# Altium PCB Rev3_3_PCB.PcbDoc (part 2 of 2)
Units mm, origin at the board's own origin, x right, y up, seen from the top; angles counter-clockwise.
Board outline 83.3 x 97.3 mm, 4 copper layers (Top Layer, Ground, Power, Bottom Layer), stack 1.527 mm thick; 95 components, 66 nets, 384 pads, 113 vias.
Unrouted connection lines stored in the file: 27.
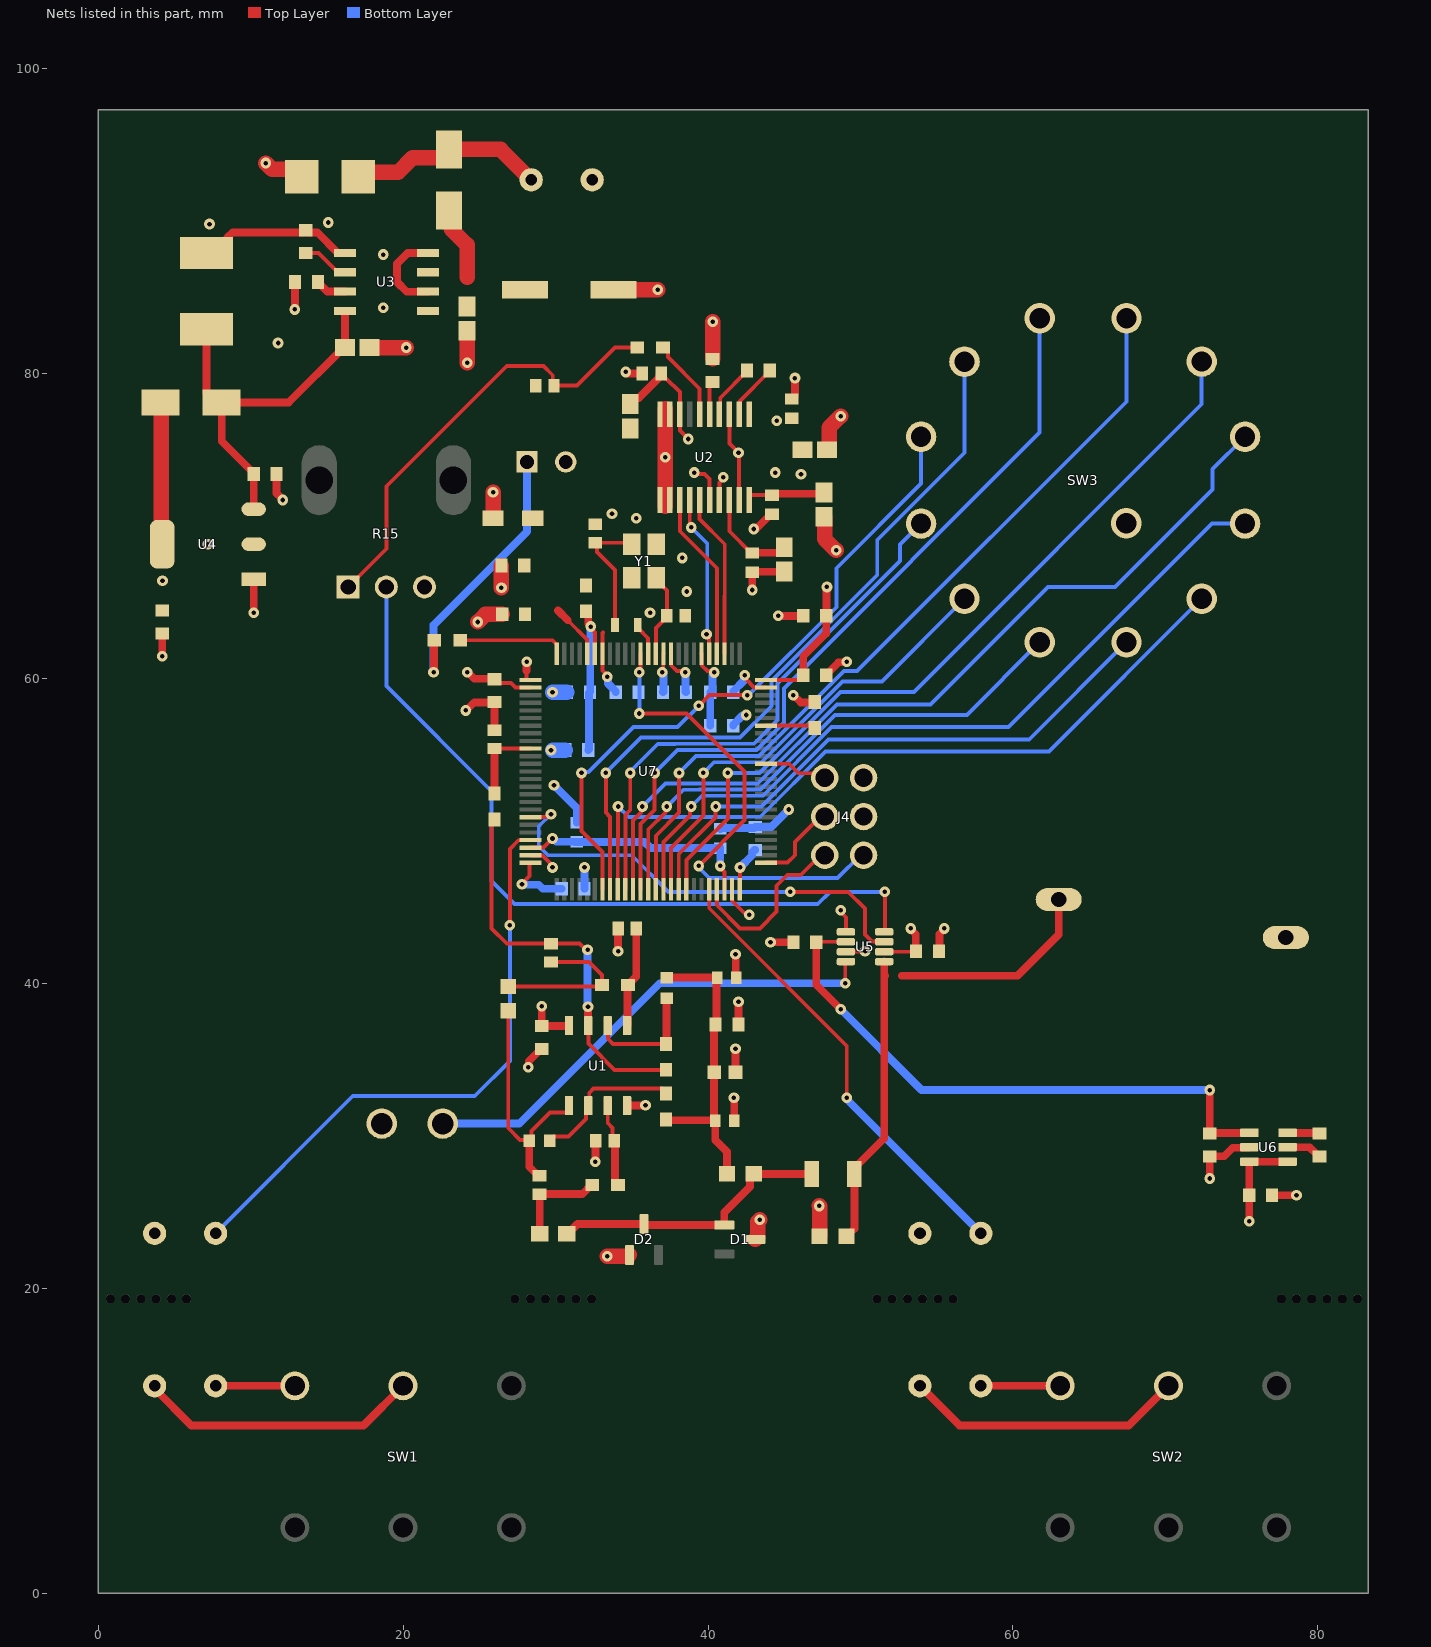
[diagram p4: the nets of this part, all layers, seen from the top]

## Via types
v1: diameter 0.7, hole 0.3, Top Layer to Bottom Layer, 113 vias

## Nets (pads, with @x,y where several pads share a name; then routed paths per layer and width w, separated by ;. In a path a pad name is that pad's centre, name@x,y a point inside that pad or via, vN(x,y) a via of type N, cw(c..) or ccw(c..) an arc to the next point about the centre after c; other vN are vias at no path point)
+1V65: C8.1 C9.2 R1.1 R2.1 R10.1 R11.1 R12.2 | length 19.8
  Top Layer w0.508: R2.1@37.25,31.075 37.3,31.025 40.424,31.025 R11.1@40.474,30.975 40.474,29.724 41.247,28.952 R10.1@41.247,27.5 ; R1.1@37.3,40.375 R12.2@40.6,40.375 40.55,40.325 40.55,37.35 40.4,37.2 C8.1@40.4,34.175 R11.1@40.4,31.049
+3V3: C1.1 C11.1 C13.2 C15.1 C16.1 C17.2 C18.2 C27.1 C28.2 C32.1 C42.1 C43.1 C44.1 C45.1 C46.1 C47.1 C48.1 C49.1 D1.3 D3.2 FB1.1 J4.2 JW1.2 JW2.2 R11.2 SW3.A U1.8 U2.1 U2.8 U2.17 U2.20 U4.2 U4.4 U5.2 U6.3 U6.4 U7.6 U7.11 U7.27 U7.50 U7.75 U7.100 | length 71.2
  Top Layer w0.254: C47.1@26,59.95 26.25,59.7 27.081,59.7 27.368,59.413 28.344,59.413 U7.27@28.357,59.4 ; v1(27.8,46.5) 27.8,46.534 28.3,47.034 28.3,47.887 28.344,47.887 U7.50@28.357,47.9 ; C18.2@36.925,80 36.925,79.925 37.173,79.677 37.248,79.677 38.15,78.775 U2.8@38.15,77.339 38.15,76.25 v1(38.7,75.7) ; v1(37,60.4) 37.066,60.466 37.066,61.609 U7.11@37.078,61.622 ; U7.6@39.578,61.622 39.591,61.609 39.591,60.846 39.96,60.477 40.314,60.477 v1(40.399,60.392) ; U2.17@40.75,71.7 40.75,72.845 41,73.095 v1(41,73.2) ; U7.75@42.078,46.178 42.091,46.191 42.091,46.86 42.1,46.869 v1(42.1,47.6) ; U2.20@42.7,71.7 42.7,71.974 42.751,72.025 C13.2@44.2,72.025 ; U7.100@43.8,59.9 45.977,59.9 46.25,60.173 C45.1@46.25,60.2 ; U5.2@51.555,42.075 53.625,42.075 C28.2@53.65,42.1
  Top Layer w0.508: v1(24.2,60.4) 24.252,60.4 24.677,59.975 25.804,59.975 25.829,59.95 C47.1@26,59.95 ; v1(29.1,38.5) C1.1@29.1,37.2 30.859,37.2 30.88,37.221 U1.8@30.88,37.225 ; C16.1@34.9,78.001 34.9,78.1 35.199,78.399 35.47,78.399 36.804,79.733 36.804,79.879 C18.2@36.925,80 ; v1(41.7,32.5) 41.713,32.487 41.713,30.988 R11.2@41.726,30.975 ; C13.2@44.2,72.025 44.288,72.113 47.512,72.113 C11.1@47.6,72.201 ; C45.1@46.25,60.2 46.25,61.45 47.75,62.95 C44.1@47.75,64.1 47.775,64.125 47.775,65.975 v1(47.8,66) ; v1(53.3,43.6) 53.3,43.548 53.625,43.223 53.625,42.296 53.65,42.271 C28.2@53.65,42.1 ; v1(75.5,24.4) C32.1@75.5,26.1 U6.3@75.5,28.3 U6.4@78.01,28.3
  Top Layer w1.016: D3.2@4.1,78.1 4.15,78.05 4.15,68.85 U4.4@4.2,68.8 ; FB1.1@25.9,70.5 v1(25.9,72.2) ; D1.3@43.1,23.2 43.252,23.352 43.252,24.352 v1(43.4,24.5)
  Bottom Layer w0.508: v1(27.8,46.5) 27.837,46.463 28.903,46.463 29.166,46.2 C48.1@30.4,46.2 ; C46.1@37.05,59.1 37.075,59.125 37.075,60.375 v1@37.1,60.4 ; C42.1@40.15,56.9 40.15,57.884 40.154,57.888 40.154,59.096 40.296,59.238 40.296,60.237 40.399,60.34 v1(40.399,60.392) ; v1(42.1,47.6) 42.904,48.404 42.904,48.604 43.05,48.75 C49.1@43.1,48.75
  other v1: 4.22,66.414 7.2,68.8 46.1,73.4 44.4,73.5 44.5,76.9
+9V: CR1.1 D4.2 J1.1 | length 13
  Top Layer w1.016: CR1.1@17.054,92.9 17.348,93.194 19.67,93.194 20.626,94.149 22.658,94.149 23,94.491 D4.2@23,94.7 26.4,94.7 J1.1@28.4,92.7
+9V_PROT: C22.1 C23.1 D4.1 U3.5 U3.7 | length 4.9
  Top Layer w1.016: D4.1@23,90.7 23.142,90.558 23.142,89.487 24.2,88.429 24.2,86.3
-3V3: C29.1 C30.2 U5.6 U6.1 | length 38.9
  Top Layer w0.254: C30.2@47.1,42.7 47.125,42.725 U5.6@49.045,42.725
  Top Layer w0.508: C30.2@47.1,42.7 47.1,39.9 v1(48.7,38.3) ; v1(72.9,33) C29.1@72.9,30.15 72.925,30.175 75.475,30.175 U6.1@75.5,30.2
  Bottom Layer w0.508: v1(48.7,38.3) 54,33 v1(72.9,33)
BIASED_INPUT: C7.2 D1.1 D2.3 R8.1 R10.2 | length 18.6
  Top Layer w0.508: R8.1@30.725,23.575 30.797,23.575 31.437,24.215 D2.3@35.8,24.215 35.865,24.15 D1.1@41.07,24.15 41.07,24.97 42.751,26.651 42.751,27.251 R10.2@43,27.5 C7.2@46.8,27.5
GND: C1.2 C3.2 C5.2 C6.2 C8.2 C9.1 C10.2 C11.2 C12.1 C13.1 C15.2 C16.2 C17.1 C18.1 C19.2 C20.2 C22.2 C23.2 C24.2 C25.2 C26.2 C27.2 C28.1 C29.2 C30.1 C32.2 C33.2 C34.2 C35.1 C36.2 C37.2 C38.2 C39.2 C40.2 C41.2 C42.2 C43.2 C44.2 C45.2 C46.2 C47.2 C48.2 C49.2 CR1.2 D2.1 DS1.2 J1.2 J2.1 J3.S J4.3 R12.1 R13.2 R15.3 R18.1 U1.4 U2.3 U2.9 U2.10 U2.11 U2.12 U2.16 U2.19 U3.6 U3.8 U4.1 U5.5 U5.7 U6.2 U7.10 U7.19 U7.26 U7.49 U7.74 U7.99 Y1.2 Y1.4 | length 119.9
  Top Layer w0.254: 28.1,60.5 28.1,59.913 28.113,59.9 U7.26@28.357,59.9 ; U7.49@28.357,48.4 28.37,48.387 29.132,48.387 29.8,47.719 v1(29.8,47.6) ; 33.1,63 33.078,62.978 U7.19@33.078,61.622 33.078,60.51 33.4,60.188 v1(33.4,60.1) ; U7.10@37.578,61.622 37.591,61.609 37.591,60.846 37.962,60.476 38.415,60.476 v1(38.5,60.391) ; v1(39.1,73.5) 39.185,73.415 39.765,73.415 40.1,73.079 U2.16@40.1,71.7 ; U2.3@41.4,77.339 41.4,75.4 42.025,74.775 42.025,71.725 U2.19@42.05,71.7 ; U7.74@41.578,46.178 41.591,46.166 41.591,45.403 42.409,44.585 42.615,44.585 v1(42.7,44.5) ; v1(42.4,60.2) 42.485,60.115 42.485,59.952 43.025,59.413 U7.99@43.787,59.413 ; v1(48.7,44.8) 48.7,44.679 49.045,44.334 U5.5@49.045,43.375 ; U5.7@49.045,42.075 49.058,42.088 50.288,42.088 v1(50.3,42.1)
  Top Layer w0.508: v1(4.2,61.45) C27.2@4.2,62.95 ; v1(10.2,64.3) U4.1@10.2,66.5 ; C26.2@11.7,73.4 11.7,72.152 12.1,71.752 v1(12.1,71.7) ; v1(12.9,84.2) 12.906,84.206 12.906,85.994 C24.2@12.911,86 ; U3.6@21.635,85.365 20.235,85.365 19.6,86 19.6,87.2 20.305,87.905 U3.8@21.635,87.905 ; v1(24.1,57.9) 24.152,57.9 24.677,58.425 25.804,58.425 25.829,58.45 C47.2@26,58.45 C6.2@26,56.6 ; 28.1,60.5 v1(28.1,61.1) ; v1(28.2,34.5) 28.237,34.537 28.237,34.887 29.05,35.7 C1.2@29.1,35.7 ; v1(32.6,28.3) 32.625,28.325 32.625,29.65 C5.2@32.65,29.675 ; v1(34.1,42.1) C3.2@34.1,43.6 ; v1(34.6,80.1) 34.652,80.1 34.752,80 C18.1@35.675,80 ; U1.4@34.69,31.975 34.703,31.988 35.887,31.988 v1(35.9,32) ; C8.2@41.8,34.175 v1(41.8,35.7) ; v1(41.8,41.9) 41.826,41.874 41.826,40.401 R12.1@41.852,40.375 ; C9.1@42,37.3 v1(42,38.8) ; v1(42.9,65.8) C12.1@42.9,66.975 42.912,66.987 44.988,66.987 C10.2@45,66.999 ; v1(43,69.8) 43.037,69.837 43.187,69.837 44.125,70.775 C13.1@44.2,70.775 ; v1(44.1,42.7) C30.1@45.6,42.7 ; v1(44.6,64.1) C44.2@46.25,64.1 ; C17.1@45.5,78.325 45.575,78.325 45.696,78.446 45.696,78.74 45.7,78.744 v1(45.7,79.7) ; v1(45.6,58.9) 46.075,58.425 46.854,58.425 46.879,58.45 R18.1@47,58.45 ; C45.2@47.75,60.2 47.75,60.25 48.563,61.063 49.063,61.063 v1(49.1,61.1) ; C28.1@55.15,42.1 55.15,42.271 55.175,42.296 55.175,43.223 55.5,43.548 v1(55.5,43.6) ; v1(72.9,27.2) C29.2@72.9,28.65 73.85,28.65 74.414,29.214 75.464,29.214 U6.2@75.5,29.25 ; C32.2@77,26.1 v1(78.6,26.1)
  Top Layer w1.016: v1(10.989,93.8) 11.404,93.385 12.861,93.385 CR1.2@13.346,92.9 ; C25.2@17.8,81.7 v1(20.2,81.7) ; v1(24.2,80.7) C22.2@24.2,82.799 ; v1(24.9,63.7) 25.4,64.2 C37.2@26.5,64.2 ; v1(26.45,65.95) C36.2@26.45,67.4 ; v1(33.4,22.1) 34.765,22.1 D2.1@34.85,22.185 ; C23.2@33.803,85.5 v1(36.7,85.5) ; 37.2,71.3 37.2,77.7 ; C19.2@40.3,80.95 v1(40.3,83.4) ; v1(47.3,25.4) 47.323,25.377 R13.2@47.323,23.4 ; C11.2@47.6,70.599 47.645,70.554 47.645,69.155 v1(48.4,68.4) ; C15.2@47.801,75 47.9,75 47.945,75.045 47.945,76.445 v1(48.7,77.2)
  Bottom Layer w0.508: v1(29.9,53) 31.4,51.5 C38.2@31.4,50.527 ; C48.2@31.9,46.2 v1(31.9,47.6) ; v1(33.4,60.1) 33.437,60.063 33.437,59.663 33.95,59.15 C35.1@33.95,59.1 ; v1(38.5,60.391) 38.525,60.366 38.525,59.125 C46.2@38.55,59.1 ; C39.2@40.8,50.127 40.861,50.189 43.038,50.189 C49.2@43.1,50.25 44.15,50.25 v1(45.3,51.4) ; C42.2@41.65,56.9 41.65,56.95 42.263,57.563 42.463,57.563 v1(42.5,57.6) ; C43.2@41.65,59.1 41.65,59.15 42.363,59.863 42.363,60.163 v1(42.4,60.2)
  Bottom Layer w1.016: v1@29.8,55.3 C40.2@30.65,55.3 ; v1(29.8,59.1) C41.2@30.75,59.1
  other v1: 29.7,55.3 36.2,64.3 38.6,65.7 38.3,67.9 35.3,70.5 33.7,70.8 37.2,74.5 42,74.8 11.8,82 18.7,84.3 18.7,87.8 7.3,89.8 15.1,89.9
LDOO: C10.1 C12.2 U2.18 | length 6.4
  Top Layer w0.254: U2.18@41.4,71.7 41.4,69.65 42.825,68.225 C12.2@42.9,68.225
  Top Layer w0.508: C12.2@42.9,68.225 43.075,68.225 43.096,68.246 44.701,68.246 45,68.545 C10.1@45,68.601
NetC2_1: C2.1 R6.2 R7.1 | length 10.5
  Top Layer w0.254: R6.2@26.9,39.8 32.95,39.8 R7.1@33.05,39.9 33.05,40.55 32.2,41.4 C2.1@29.7,41.4
NetC2_2: C2.2 R3.1 R5.1 U1.7 | length 26.1
  Top Layer w0.254: R5.1@26,50.75 25.8,50.55 25.8,43.6 26.8,42.6 C2.2@29.7,42.6 31.579,42.6 31.979,42.2 v1(32.1,42.2) ; U1.7@32.15,37.225 32.15,36.05 33.875,34.325 R3.1@37.25,34.325
  Top Layer w0.508: v1(32.129,38.471) 32.129,37.246 U1.7@32.15,37.225
  Bottom Layer w0.508: v1(32.1,42.2) 32.1,38.5 v1(32.129,38.471)
NetC3_1: C3.1 R7.2 U1.5 | length 6.7
  Top Layer w0.508: U1.5@34.69,37.225 34.711,37.246 34.711,39.861 R7.2@34.75,39.9 34.8,39.9 34.946,40.046 34.946,40.096 35.3,40.45 C3.1@35.3,43.6
NetC4_1: C4.1 R8.2 R9.1 | length 6.3
  Top Layer w0.508: R8.2@28.975,23.575 28.962,23.587 28.962,26.163 C4.1@28.95,26.175 31.75,26.175 32.35,26.775 R9.1@32.4,26.775
NetC4_2: C4.2 R4.1 R6.1 U1.1 | length 16.1
  Top Layer w0.254: R6.1@26.9,38.2 26.9,30.5 27.665,29.735 28.214,29.735 R4.1@28.275,29.675 28.413,29.814 28.413,30.313 29.626,31.526 30.732,31.526 30.88,31.674 U1.1@30.88,31.975
  Top Layer w0.508: R4.1@28.275,29.675 28.275,27.975 28.875,27.375 C4.2@28.95,27.375
NetC5_1: C5.1 R9.2 U1.3 | length 5.1
  Top Layer w0.254: U1.3@33.42,31.975 33.42,30.829 33.742,30.506 33.742,29.783 C5.1@33.85,29.675
  Top Layer w0.508: R9.2@33.9,26.8 C5.1@33.9,29.375
NetC6_1: C6.1 R5.2 U7.35 | length 5.3
  Top Layer w0.254: C6.1@26,55.4 U7.35@28.357,55.4
  Top Layer w0.508: R5.2@26,52.45 C6.1@26,55.4
NetC14_1: C14.1 U2.4 | length 3.6
  Top Layer w0.254: U2.4@40.75,77.339 40.801,77.39 40.801,78.401 42.55,80.15 C14.1@42.55,80.2
NetC14_2: C14.2 U2.2 | length 3.7
  Top Layer w0.254: U2.2@42.05,77.339 42.101,77.39 42.101,78.201 44.05,80.15 C14.2@44.05,80.2
NetC20_1: C20.1 R14.2 R15.1 | length 29.3
  Top Layer w0.254: R15.1@16.4,66 18.9,68.5 18.9,72.6 26.8,80.5 29.2,80.5 29.818,79.882 29.818,79.282 C20.1@29.9,79.2 31.4,79.2 33.9,81.7 R14.2@35.35,81.7
NetC21_1: C21.1 U3.2 | length 3.1
  Top Layer w0.254: C21.1@13.611,87.9 14.458,87.9 15.723,86.635 U3.2@16.187,86.635
NetC21_2: C21.2 L1.2 U3.1 | length 10.5
  Top Layer w0.508: L1.2@7.1,87.902 7.687,87.902 8.487,88.702 8.487,88.92 8.821,89.254 13.465,89.254 C21.2@13.611,89.4 13.757,89.254 14.374,89.254 15.723,87.905 U3.1@16.187,87.905
NetC24_1: C24.1 U3.3 | length 2.1
  Top Layer w0.508: C24.1@14.411,86 14.411,85.95 14.557,85.804 14.607,85.804 15.033,85.378 16.174,85.378 U3.3@16.187,85.365
NetC25_1: C25.1 C26.1 D3.1 L1.1 U3.4 U4.3 | length 25.3
  Top Layer w0.508: L1.1@7.1,82.898 7.1,79.1 7.104,79.096 7.104,78.696 7.7,78.1 D3.1@8.1,78.1 ; U4.3@10.2,71.1 C26.1@10.2,73.4 10.2,73.45 8.1,75.55 D3.1@8.1,78.1 ; U3.4@16.187,84.095 16.193,84.089 16.193,81.706 C25.1@16.199,81.7 16.099,81.7 12.499,78.1 D3.1@8.1,78.1
NetC31_1: C31.1 U6.5 | length 2.3
  Top Layer w0.508: U6.5@78.01,29.25 79.45,29.25 80.05,28.65 C31.1@80.1,28.65
NetC31_2: C31.2 U6.6 | length 2.1
  Top Layer w0.508: U6.6@78.01,30.2 78.035,30.175 80.075,30.175 C31.2@80.1,30.15
NetC34_1: C34.1 R16.1 Y1.3 | length 8.4
  Top Layer w0.254: R16.1@33.9,63.5 33.9,67.1 32.707,68.293 32.707,68.793 C34.1@32.6,68.9 34.9,68.9 Y1.3@35,68.8
NetDS1_1: DS1.1 R17.1 | length 18.5
  Top Layer w0.508: v1(22,60.4) 22.025,60.425 22.025,62.475 R17.1@22.05,62.5
  Bottom Layer w0.508: v1(22,60.4) 22,63.5 28.13,69.63 DS1.1@28.13,74.2
NetJW1_1: JW1.1 SW1.1 | length 18.6
  Top Layer w0.508: JW1.1@3.7,13.6 3.7,13.4 6.1,11 17.4,11 SW1.1@20,13.6
NetJW2_1: JW2.1 SW2.1 | length 18.5
  Top Layer w0.508: JW2.1@53.9,13.6 56.5,11 67.6,11 SW2.1@70.2,13.6
NetJW3_1: JW3.1 SW1.4 | length 5.2
  Top Layer w0.508: JW3.1@7.7,13.6 SW1.4@12.9,13.6
NetJW3_2: JW3.2 U7.47 | length 39.5
  Top Layer w0.254: v1(27,43.8) 27,48.806 27.582,49.387 28.344,49.387 U7.47@28.357,49.4
  Bottom Layer w0.254: JW3.2@7.7,23.6 16.7,32.6 24.7,32.6 27,34.9 v1(27,43.8)
NetJW4_1: JW4.1 SW2.4 | length 5.2
  Top Layer w0.508: JW4.1@57.9,13.6 SW2.4@63.1,13.6
NetJW4_2: JW4.2 U7.71 | length 30
  Top Layer w0.254: U7.71@40.078,46.178 40.078,44.922 49.1,35.9 v1(49.1,32.5)
  Bottom Layer w0.508: v1(49.1,32.5) 49.137,32.463 49.137,32.363 JW4.2@57.9,23.6
NetR1_2: R1.2 R3.2 U1.6 | length 7.8
  Top Layer w0.254: U1.6@33.42,37.225 33.432,37.213 33.432,36.368 33.775,36.025 R3.2@37.25,36.025
  Top Layer w0.508: R3.2@37.25,36.025 37.275,36.05 37.275,39 R1.2@37.3,39.025
NetR2_2: R2.2 R4.2 U1.2 | length 10.1
  Top Layer w0.254: R4.2@29.625,29.675 29.625,29.703 29.876,29.954 30.854,29.954 32,31.1 32,31.328 32.002,31.33 32.002,31.827 32.213,32.038 32.213,32.813 32.5,33.1 36.828,33.1 36.83,33.098 36.977,33.098 37.25,32.825 R2.2@37.25,32.775
NetR17_2: R17.2 U7.25 | length 7
  Top Layer w0.254: R17.2@23.75,62.5 29.791,62.5 30.078,62.213 U7.25@30.078,61.622
NetR18_2: R18.2 U7.94 | length 3.3
  Top Layer w0.254: U7.94@43.8,56.9 46.85,56.9 R18.2@47,56.75
NetSW3_1: SW3.1 U7.65 | length 50.2
  Top Layer w0.254: U7.65@37.078,46.178 37.078,49.278 38.815,51.015 38.815,51.515 v1(38.9,51.6)
  Bottom Layer w0.254: v1(38.9,51.6) 39.6,52.3 43.6,52.3 48.1,56.8 59.7,56.8 73.053,70.153 SW3.1@75.225,70.153
NetSW3_2: SW3.2 U7.59 | length 49.9
  Top Layer w0.254: U7.59@34.078,46.178 34.078,49.071 34.1,49.093 v1(34.1,51.6)
  Bottom Layer w0.254: v1(34.1,51.6) 34.8,50.9 42.508,50.9 42.535,50.927 43.427,50.927 47.7,55.2 62.356,55.2 SW3.2@72.378,65.222
NetSW3_3: SW3.3 U7.67 | length 37.8
  Top Layer w0.254: U7.67@38.078,46.178 38.078,48.478 40.487,50.887 40.487,51.587 v1(40.5,51.6)
  Bottom Layer w0.254: v1(40.5,51.6) 43.5,51.6 47.9,56 61.072,56 SW3.3@67.447,62.375
NetSW3_4: SW3.4 U7.63 | length 34.8
  Top Layer w0.254: U7.63@36.078,46.178 36.078,50.078 37.215,51.215 37.215,51.515 v1(37.3,51.6)
  Bottom Layer w0.254: v1(37.3,51.6) 38.4,52.7 39.429,52.7 39.433,52.704 43.433,52.704 48.329,57.6 56.978,57.6 SW3.4@61.753,62.375
NetSW3_5: SW3.5 U7.66 | length 30.4
  Top Layer w0.254: U7.66@37.578,46.178 37.578,48.878 39.7,51 v1(39.7,53.8)
  Bottom Layer w0.254: v1(39.7,53.8) 40.4,54.5 43.515,54.5 48.815,59.8 51.4,59.8 SW3.5@56.822,65.222
NetSW3_6: SW3.6 U7.60 | length 35.7
  Top Layer w0.254: U7.60@34.578,46.178 34.578,51.05 34.9,51.371 v1(34.9,53.8)
  Bottom Layer w0.254: v1(34.9,53.8) 34.9,53.9 36.7,55.7 37.829,55.7 37.841,55.712 43.012,55.712 44.569,57.269 44.569,59.669 52.6,67.7 52.6,68.778 SW3.6@53.975,70.153
NetSW3_7: SW3.7 U7.57 | length 42.9
  Top Layer w0.254: v1(31.7,53.8) 31.7,50 33.078,48.622 U7.57@33.078,46.178 ; v1(39.4,58.2) 40.1,58.9 v1(42.569,58.9)
  Bottom Layer w0.254: v1(31.7,53.8) 31.763,53.863 32.163,53.863 35.1,56.8 38,56.8 v1(39.4,58.2) ; v1(42.569,58.9) 42.657,58.9 48.427,64.67 48.427,67.227 53.975,72.775 SW3.7@53.975,75.847
NetSW3_8: SW3.8 U7.58 | length 48.2
  Top Layer w0.254: v1(33.3,53.8) 33.3,51.2 33.578,50.922 U7.58@33.578,46.178
  Bottom Layer w0.254: v1@33.318,53.818 35.616,56.116 42.108,56.116 44.165,58.173 44.165,59.836 51.1,66.771 51.1,69.081 56.822,74.802 SW3.8@56.822,80.778
NetSW3_9: SW3.9 U7.62 | length 51.3
  Top Layer w0.254: U7.62@35.566,46.166 U7.62@35.578,46.178 35.578,50.45 36.5,51.371 v1(36.5,53.8)
  Bottom Layer w0.254: v1(36.5,53.8) 38,55.3 39.029,55.3 39.037,55.308 43.18,55.308 44.973,57.101 44.973,59.349 61.753,76.129 SW3.9@61.753,83.625
NetSW3_10: SW3.10 U7.64 | length 53.2
  Top Layer w0.254: U7.64@36.578,46.178 36.578,49.678 38.1,51.2 v1(38.1,53.8)
  Bottom Layer w0.254: v1(38.1,53.8) 39.2,54.9 40.229,54.9 40.233,54.904 43.347,54.904 48.916,60.473 49.773,60.473 67.447,78.147 SW3.10@67.447,83.625
NetSW3_11: SW3.11 U7.68 | length 52.6
  Top Layer w0.254: U7.68@38.578,46.178 38.578,48.078 41.3,50.8 v1(41.3,53.8)
  Bottom Layer w0.254: v1(41.3,53.8) 43.386,53.8 48.686,59.1 53.5,59.1 72.378,77.978 SW3.11@72.378,80.778
NetSW3_12: SW3.12 U7.61 | length 56
  Top Layer w0.254: U7.61@35.078,46.178 35.078,50.678 35.615,51.215 35.615,51.515 v1(35.7,51.6)
  Bottom Layer w0.254: v1(35.7,51.6) 37.208,53.108 43.265,53.108 48.457,58.3 54.6,58.3 62.3,66 66.7,66 73.1,72.4 73.1,73.722 SW3.12@75.225,75.847
NetU2_13: U2.13 U7.4 | length 11.1
  Top Layer w0.254: U2.13@38.15,71.7 38.15,69.65 40.578,67.222 U7.4@40.578,61.622
NetU2_14: U2.14 U7.5 | length 10.6
  Top Layer w0.254: v1@38.8,70 U2.14@38.8,71.7 ; v1@39.951,62.9 39.951,62.779 40.066,62.665 40.066,61.634 U7.5@40.078,61.622
  Bottom Layer w0.254: v1@38.8,70 39.951,68.849 v1@39.951,62.9
  other v1: 39.9,62.9 38.9,69.9
NetU2_15: U2.15 U7.3 | length 10.8
  Top Layer w0.254: U2.15@39.45,71.7 39.45,70.45 41.1,68.8 41.1,65.417 41.078,65.396 U7.3@41.078,61.622
NetU5_3: U5.3 U7.44 | length 30.1
  Top Layer w0.254: U7.44@28.357,50.9 29.379,50.9 29.579,51.1 v1(29.7,51.1) ; v1(45.4,46) 49.2,46 50.3,44.9 50.3,43.2 50.762,42.738 51.542,42.738 U5.3@51.555,42.725
  Bottom Layer w0.254: v1(29.7,51.1) 28.9,50.3 28.9,49 29.5,48.4 35,48.4 37.4,46 v1(45.4,46)
NRST: C35.2 J4.1 U7.14 | length 31.7
  Top Layer w0.254: v1(35.5,57.7) 38.6,57.7 42.4,53.9 42.4,50.7 v1(39.4,47.7) ; v1(35.5,60.4) 35.566,60.466 35.566,61.609 U7.14@35.578,61.622
  Bottom Layer w0.254: v1(35.5,57.7) 35.5,59.15 v1(35.5,60.4) ; v1(39.4,47.7) 39.4,47.579 40.079,46.9 48.5,46.9 50,48.4 J4.1@50.2,48.4
OUTL: R14.1 U2.6 | length 5.4
  Top Layer w0.254: R14.1@37.05,81.7 37.1,81.7 37.373,81.427 37.373,81.077 37.434,81.016 39.45,79 U2.6@39.45,77.339
PEDAL_IN: C7.1 J2.2 R13.1 U5.1 | length 32.9
  Top Layer w0.508: R13.1@49.077,23.4 49.1,23.4 49.6,23.9 49.6,27.875 51.555,29.83 51.555,40.575 ; U5.1@51.555,41.425 51.555,40.575 ; 51.63,40.5 51.555,40.575 ; 52.7,40.5 60.3,40.5 63,43.2 J2.2@63,45.5
PEDAL_OUT: J3.T U5.8 | length 31.7
  Top Layer w0.254: v1(49,40) 49,41.38 U5.8@49.045,41.425
  Bottom Layer w0.508: J3.T@22.6,30.8 27.626,30.8 36.826,40 v1(49,40)
PH0-OSC_IN: C33.1 U7.12 Y1.1 | length 5.5
  Top Layer w0.254: U7.12@36.578,61.622 36.578,63.303 C33.1@37.3,64.025 ; Y1.1@36.6,66.6 36.6,66.475 37.3,65.775 C33.1@37.3,64.1
PH1-OSC_OUT: R16.2 U7.13 | length 2.2
  Top Layer w0.254: R16.2@35.4,63.5 35.4,63.3 36.066,62.634 36.066,61.634 U7.13@36.078,61.622
SWCLK: J4.5 U7.76 | length 5.6
  Top Layer w0.254: U7.76@43.8,47.9 43.813,47.913 45.213,47.913 45.7,48.4 45.7,49.26 47.38,50.94 J4.5@47.66,50.94
SWDIO: J4.4 U7.72 | length 11.8
  Top Layer w0.254: U7.72@40.578,46.178 40.578,45.122 42.1,43.6 43.4,43.6 44.5,44.7 44.5,46.4 45.2,47.1 46.08,47.1 47.38,48.4 J4.4@47.66,48.4
SWO: J4.6 U7.89 | length 4.2
  Top Layer w0.254: U7.89@43.8,54.4 45.3,54.4 45.924,53.776 47.364,53.776 J4.6@47.66,53.48
SYNTH_POST_VOL: R15.2 U5.4 | length 51.6
  Top Layer w0.254: U5.4@51.555,43.375 51.6,43.42 v1(51.6,46)
  Bottom Layer w0.254: R15.2@18.9,66 18.9,59.5 25.8,52.6 25.8,46.7 27.3,45.2 47.2,45.2 48,46 v1(51.6,46)
VCAP: C38.1 C39.1 U7.48 U7.73 | length 15.8
  Top Layer w0.254: U7.48@28.357,48.9 28.37,48.913 29.213,48.913 v1(29.8,49.5) ; v1(40.8,47.7) 40.8,47.579 41.078,47.301 U7.73@41.078,46.178
  Bottom Layer w0.508: v1(29.8,49.5) 29.852,49.5 30.065,49.287 31.248,49.287 31.261,49.273 35.837,49.273 36.237,48.873 C39.1@40.8,48.873 v1(40.8,47.7)
VDDA: C36.1 C37.1 FB1.2 R19.1 U7.21 | length 3.6
  Top Layer w0.254: 30.8,63.813 32.066,62.548 32.066,61.634 U7.21@32.078,61.622
  Top Layer w0.508: 30.158,64.455 30.8,63.813
VNEG: C19.1 U2.5 | length 2.2
  Top Layer w0.254: U2.5@40.1,77.339 40.1,79.25 C19.1@40.3,79.45
VREF+: C40.1 C41.1 R19.2 U7.20 | length 11.2
  Top Layer w0.254: v1(32.3,63.4) 32.3,63.279 32.578,63.001 U7.20@32.578,61.622
  Top Layer w0.508: R19.2@32,64.4 32.146,64.254 32.146,63.606 32.3,63.452 v1(32.3,63.4)
  Bottom Layer w0.508: C40.1@32.15,55.3 32.2,55.35 32.2,59.05 32.275,59.125 32.275,63.375 v1(32.3,63.4)
pads on no net: D1.2 D2.2 R15.S1 R15.S2 SW1.2 SW1.3 SW1.5 SW1.6 SW2.2 SW2.3 SW2.5 SW2.6 U2.7 U7.1 U7.2 U7.7 U7.8 U7.9 U7.15 U7.16 U7.17 U7.18 U7.22 U7.23 U7.24 U7.28 U7.29 U7.30 U7.31 U7.32 U7.33 U7.34 U7.36 U7.37 U7.38 U7.39 U7.40 U7.41 U7.42 U7.43 U7.45 U7.46 U7.51 U7.52 U7.53 U7.54 U7.55 U7.56 U7.69 U7.70 U7.77 U7.78 U7.79 U7.80 U7.81 U7.82 U7.83 U7.84 U7.85 U7.86 U7.87 U7.88 U7.90 U7.91 U7.92 U7.93 U7.95 U7.96 U7.97 U7.98

## Polygon pours and split planes (outlines as drawn)
GND on Top Layer "GND_L01_P039" (solid, pour order 39): 2.2,90.4 20.3,90.4 20.3,80.4 2.2,80.4
GND on Top Layer "GND_L01_P040" (solid, pour order 40): 20.3,90.4 23.3,87.4 26.8,87.4 26.8,80.4 20.3,80.4
+3V3 on Top Layer "+3V3_L01_P036" (solid, pour order 36): 5,67.6 3.596,67.6 3.501,70 5,70 10.7,69.2 10.7,68.4
+3V3 on Top Layer "+3V3_L01_P038" (solid, pour order 38): 3.8,64.1 4.6,64.1 5.023,67.8 3.377,67.8
+9V_PROT on Top Layer "+9V_PROT_L01_P035" (solid, pour order 35): 22.3,86.4 23.1,85.6 23.1,85.1 22.3,84.3 22.3,83.9 25.5,83.9 26.8,85.2 26.8,85.8 25.8,86.8 22.3,86.8
PEDAL_IN on Top Layer "PEDAL_IN_L01_P033" (solid, pour order 33): 53,40.75 53,40.25 51.775,39.025 51.675,39.025 51.675,40.75 51.652,40.772
PEDAL_IN on Top Layer "PEDAL_IN_L01_P032" (solid, pour order 32): 52.125,41.625 53.075,40.675 51.75,40.675 51.555,40.87 51.555,41.425
+3V3 on Top Layer "+3V3_L01_P028" (solid, pour order 28): 48.2,72.9 46.8,74.3 46.8,77.4 43.6,77.4 42.9,78.1 42.6,78.1 42.6,76.6 43.4,75.8 43.4,73.3 42.6,72.5 42.6,71.7 48.2,71.7
GND on Top Layer "GND_L01_P000" (solid, pour order 0): 32.9,62.5 32.9,66.2 33,66.3 31.2,68.1 31.2,71.8 37.166,71.8 39.5,67.5 39.5,62.5
GND on Top Layer "GND_L01_P025" (solid, pour order 25): 36.6,78.2 37.7,78.2 37.7,75.7 34.3,75.7 34.3,77.1 35.5,77.1
VDDA on Top Layer "VDDA_L01_P021" (solid, pour order 21): 27.6,63.8 29.8,63.8 31.7,65.7 31.7,66.5 29.2,69 29.2,71 27.6,71
no net on Bottom Layer "NONET_L04_P034" (solid, pour order 34): 22.3,86.4 22.9,85.8
+3V3 on Power (split plane): 32.59,7.2 32.59,7.068 32.59,0.51 0.51,0.51 0.51,17.129 7.151,17.129 7.236,17.107 7.253,17.104 7.269,17.099 7.302,17.096 7.335,17.09 7.352,17.091 7.368,17.089 25.749,17.089 25.768,17.091 25.848,17.099 26.001,17.129 32.59,17.129
+3V3 on Power (split plane): 82.79,0.51 50.861,0.51 50.861,7.064 50.861,7.068 50.861,7.2 50.861,17.129 57.45,17.129 57.536,17.106 57.553,17.103 57.569,17.099 57.602,17.095 57.635,17.09 57.652,17.09 57.668,17.089 75.999,17.089 76.018,17.091 76.098,17.099 76.253,17.129 82.79,17.129
+3V3 on Power (split plane): 82.79,20.134 75,20.134 74.832,20.125 74.748,20.11 58.452,20.11 58.368,20.125 58.2,20.134 48.9,20.134 48.732,20.125 48.648,20.11 34.952,20.11 34.868,20.125 34.7,20.134 25.4,20.134 25.232,20.125 25.151,20.111 8.549,20.111 8.468,20.125 8.3,20.134 0.51,20.134 0.51,33.089 22.6,33.089 22.699,33.089 22.718,33.091 22.798,33.099 22.991,33.137 23.065,33.16 23.087,33.166 23.269,33.242 23.357,33.289 23.521,33.399 23.599,33.462 23.738,33.601 23.79,33.665 23.801,33.679 23.911,33.843 23.958,33.931 24.034,34.113 24.054,34.18 24.063,34.209 24.101,34.402 24.111,34.501 24.111,34.6 24.111,51.4 24.111,51.499 24.101,51.598 24.063,51.791 24.054,51.82 24.034,51.887 23.958,52.069 23.911,52.157 23.801,52.321 23.79,52.335 23.738,52.399 23.599,52.538 23.521,52.601 23.357,52.711 23.269,52.758 23.087,52.834 23.036,52.849 22.991,52.863 22.798,52.901 22.699,52.911 22.6,52.911 0.51,52.911 0.51,96.79 36.689,96.79 36.689,88.6 36.689,88.501 36.691,88.482 36.699,88.402 36.737,88.209 36.76,88.135 36.766,88.113 36.842,87.931 36.889,87.843 36.999,87.679 37.062,87.601 37.201,87.462 37.265,87.41 37.279,87.399 37.443,87.289 37.531,87.242 37.713,87.166 37.755,87.154 37.809,87.137 38.002,87.099 38.082,87.091 38.101,87.089 45.299,87.089 45.318,87.091 45.398,87.099 45.591,87.137 45.665,87.16 45.687,87.166 45.869,87.242 45.957,87.289 46.121,87.399 46.199,87.462 46.338,87.601 46.39,87.665 46.401,87.679 46.511,87.843 46.558,87.931 46.634,88.113 46.654,88.18 46.663,88.209 46.701,88.402 46.711,88.501 46.711,88.6 46.711,96.79 82.79,96.79
GND on Ground (split plane): 32.59,7.2 32.59,7.068 32.59,0.51 0.51,0.51 0.51,17.098 7.282,17.098 7.302,17.096 7.335,17.09 7.352,17.091 7.368,17.089 25.749,17.089 25.768,17.091 25.835,17.098 32.59,17.098
GND on Ground (split plane): 57.569,17.099 57.602,17.095 57.635,17.09 57.652,17.09 57.668,17.089 75.999,17.089 76.018,17.091 76.089,17.098 82.79,17.098 82.79,0.51 50.861,0.51 50.861,7.064 50.861,7.068 50.861,7.2 50.861,17.098 57.5,17.098 57.561,17.101
GND on Ground (split plane): 82.79,20.102 76.08,20.102 75.999,20.11 57.668,20.11 57.652,20.109 57.635,20.109 57.602,20.104 57.587,20.102 49.53,20.102 49.448,20.11 34.201,20.11 34.199,20.111 34.002,20.111 34,20.11 33.968,20.11 33.952,20.109 33.935,20.109 33.902,20.104 33.887,20.102 25.834,20.102 25.749,20.111 7.368,20.111 7.352,20.109 7.335,20.11 7.302,20.104 7.283,20.102 0.51,20.102 0.51,33.089 22.6,33.089 22.699,33.089 22.718,33.091 22.798,33.099 22.991,33.137 23.065,33.16 23.087,33.166 23.269,33.242 23.357,33.289 23.521,33.399 23.599,33.462 23.738,33.601 23.79,33.665 23.801,33.679 23.911,33.843 23.958,33.931 24.034,34.113 24.054,34.18 24.063,34.209 24.101,34.402 24.111,34.501 24.111,34.6 24.111,51.4 24.111,51.499 24.101,51.598 24.063,51.791 24.054,51.82 24.034,51.887 23.958,52.069 23.911,52.157 23.801,52.321 23.79,52.335 23.738,52.399 23.599,52.538 23.521,52.601 23.357,52.711 23.269,52.758 23.087,52.834 23.036,52.849 22.991,52.863 22.798,52.901 22.699,52.911 22.6,52.911 0.51,52.911 0.51,96.79 36.689,96.79 36.689,88.6 36.689,88.501 36.691,88.482 36.699,88.402 36.737,88.209 36.76,88.135 36.766,88.113 36.842,87.931 36.889,87.843 36.999,87.679 37.062,87.601 37.201,87.462 37.265,87.41 37.279,87.399 37.443,87.289 37.531,87.242 37.713,87.166 37.755,87.154 37.809,87.137 38.002,87.099 38.082,87.091 38.101,87.089 45.299,87.089 45.318,87.091 45.398,87.099 45.591,87.137 45.665,87.16 45.687,87.166 45.869,87.242 45.957,87.289 46.121,87.399 46.199,87.462 46.338,87.601 46.39,87.665 46.401,87.679 46.511,87.843 46.558,87.931 46.634,88.113 46.654,88.18 46.663,88.209 46.701,88.402 46.711,88.501 46.711,88.6 46.711,96.79 82.79,96.79

## Other copper
Top Layer:
  pour cut-out: 38.2,87.6 cw(c38.2,88.6) 37.2,88.6 37.2,100.9 cw(c38.2,100.9) 39.2,100.9 39.2,89.6 44.2,89.6 44.2,100.7 cw(c45.2,100.7) 46.2,100.7 46.2,88.6 cw(c45.2,88.6) 45.2,87.6
Ground (plane layer: these items are gaps in the copper):
  lines w1: -1.4,19.6 8.3,19.6 ; 25.2,19.6 34.9,19.6 ; 26.7,19 32.7,19 ; 48.8,19.6 58.5,19.6 ; 50.3,19 56.3,19 ; 75.3,19.6 85,19.6 ; 76.8,19 82.8,19
  lines w3: -0.9,18.6 7.4,18.6 ; 25.2,18.6 33.5,18.6 ; 49.2,18.6 57.5,18.6 ; 75.4,18.6 83.7,18.6
Power (plane layer: these items are gaps in the copper):
  lines w1: -1.4,19.6 8.6,19.6 ; 25,19.6 35,19.6 ; 25.932,19.032 32.9,19.032 ; 49,19.6 59,19.6 ; 49.932,19.032 56.9,19.032 ; 74.8,19.6 84.8,19.6 ; 75.732,19.032 82.7,19.032
  lines w3: -1,18.632 8.3,18.632 ; 25.4,18.632 34.7,18.632 ; 48.9,18.632 58.2,18.632 ; 75,18.632 84.3,18.632
Multi-Layer:
  pour cut-out: 46.1,77.4 46.8,76.7 46.8,77.4

## Silkscreen, mask and mechanical layers (free items; w line width, h text height)
Top Overlay:
  text "Guitar Synthesizer Pedal" at 58.754,93.787 h1
  text "Rev 3.3" at 66.854,91.054 h1
  text "Leo Chinchilla" at 63.454,88.554 h1
  text "+" at 3.354,26.787 h1
  text "+" at 53.554,26.787 h1
  text "SUSTAIN" at 80.454,12.246 h1 r270
  text "BYPASS" at 30.154,11.746 h1 r270
  text "+" at 3.354,11.287 h1
  text "+" at 53.554,11.287 h1
Mechanical 1:
  lines w0: 50.127,19.237 49.988,19.377 49.824,19.486 49.642,19.562 49.448,19.6 34.2,19.6 34.199,19.6 34.002,19.6 34.001,19.6 33.968,19.6 33.874,19.575 33.809,19.562 33.778,19.549 33.714,19.532 33.657,19.499 33.627,19.486 33.572,19.45 33.486,19.4 33.299,19.214 33.248,19.125 33.214,19.074 33.202,19.045 33.168,18.986 33.15,18.92 33.138,18.892 33.127,18.832 33.1,18.731 33.1,18.468 33.1,18.466 33.1,7.2 33.1,7.068 33.1,0 0,0 0,33.6 22.6,33.6 22.699,33.6 22.892,33.638 23.074,33.713 23.238,33.823 23.377,33.962 23.487,34.126 23.562,34.308 23.6,34.501 23.6,34.6 23.6,51.4 23.6,51.499 23.562,51.692 23.487,51.874 23.377,52.038 23.238,52.177 23.074,52.287 22.892,52.362 22.699,52.4 22.6,52.4 0,52.4 0,97.3 37.2,97.3 37.2,88.6 37.2,88.501 37.238,88.308 37.313,88.126 37.423,87.962 37.562,87.823 37.726,87.713 37.908,87.638 38.101,87.6 45.299,87.6 45.492,87.638 45.674,87.713 45.838,87.823 45.977,87.962 46.087,88.126 46.162,88.308 46.2,88.501 46.2,88.6 46.2,97.3 83.3,97.3 83.3,0 50.35,0 50.35,7.066 50.351,7.068 50.351,7.2 50.351,18.599 50.351,18.698 50.312,18.891 50.237,19.073 50.127,19.237 50.127,19.237 ; 50.127,19.237 50.127,19.237 ; 6.5,18.468 6.568,18.214 6.699,17.986 6.886,17.799 7.114,17.668 7.368,17.6 25.749,17.6 25.942,17.638 26.124,17.713 26.288,17.823 26.427,17.962 26.537,18.126 26.612,18.308 26.651,18.501 26.651,18.6 26.651,18.699 26.612,18.892 26.537,19.074 26.427,19.238 26.288,19.377 26.124,19.487 25.942,19.562 25.749,19.6 7.368,19.6 7.114,19.532 6.886,19.401 6.699,19.214 6.568,18.986 6.5,18.732 6.5,18.468 ; 56.8,18.468 56.868,18.213 56.999,17.985 57.186,17.799 57.414,17.667 57.668,17.599 75.999,17.599 76.192,17.638 76.374,17.713 76.538,17.823 76.677,17.962 76.787,18.126 76.862,18.308 76.9,18.501 76.9,18.6 76.9,18.698 76.862,18.891 76.787,19.073 76.677,19.237 76.538,19.377 76.374,19.486 76.192,19.562 75.999,19.6 57.668,19.6 57.414,19.532 57.186,19.4 56.999,19.214 56.868,18.986 56.8,18.731 56.8,18.468

## Text inside footprints (layer, text, board x,y; h text height)
J1: Top Overlay "+" at 28.717,91.597 h1 r180; Top Overlay "-" at 32.781,91.676 h1 r180
J3: Top Overlay "S" at 18.092,29.403 h1 r270; Top Overlay "T" at 22.156,29.403 h1 r270
U2: Top 3D Body "*" at 41.731,76.704 h1.27 r270; Top Overlay "*" at 42.929,77.91 h1.27 r270
U3: Top 3D Body "*" at 16.981,87.156 h1.27; Top Overlay "*" at 15.511,88.5 h1.27
U7: Top 3D Body "*" at 41.693,60.936 h1.27 r270; Top Overlay "*" at 42.6,62.6 h1.27 r270